# Altium PCB PCB1.PcbDoc
Units mm, origin at the board's own origin, x right, y up, seen from the top; angles counter-clockwise.
Board outline 92 x 63 mm, 2 copper layers (Top Layer, Bottom Layer); 8 components, 13 nets, 59 pads, 26 vias.
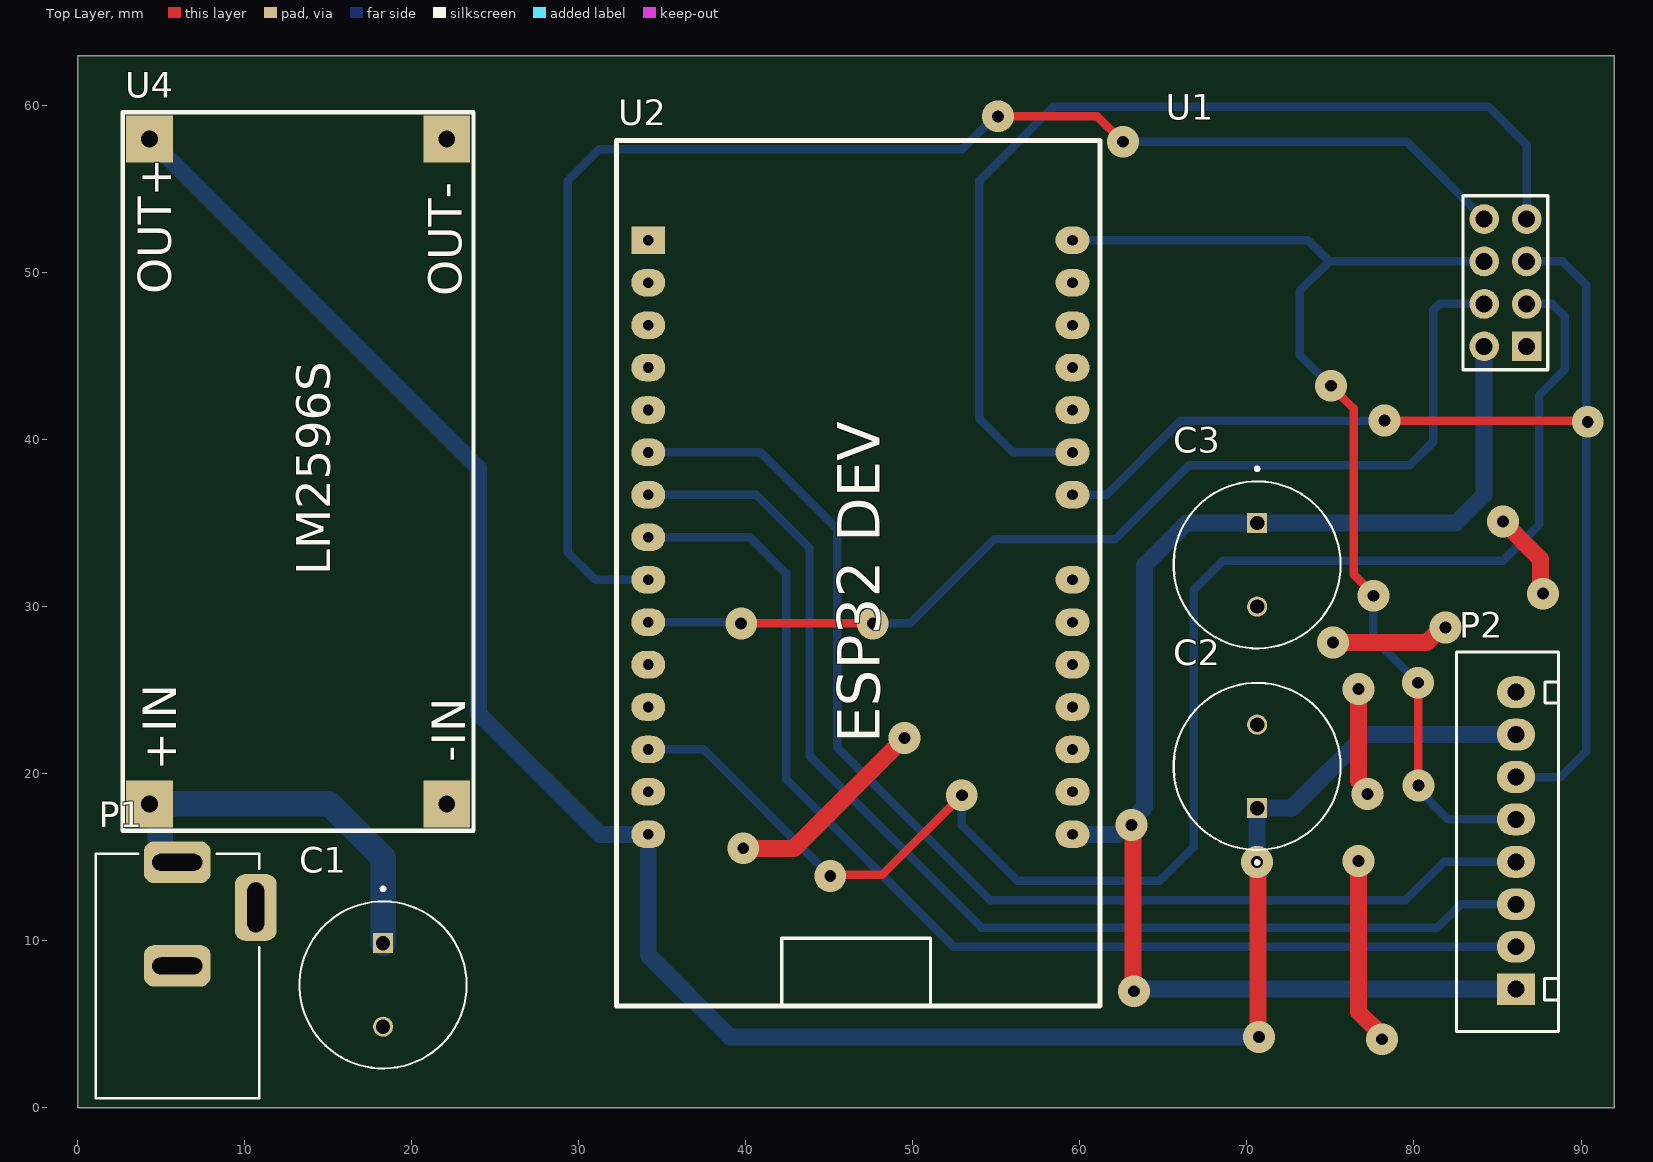
[diagram p0: Top Layer view]
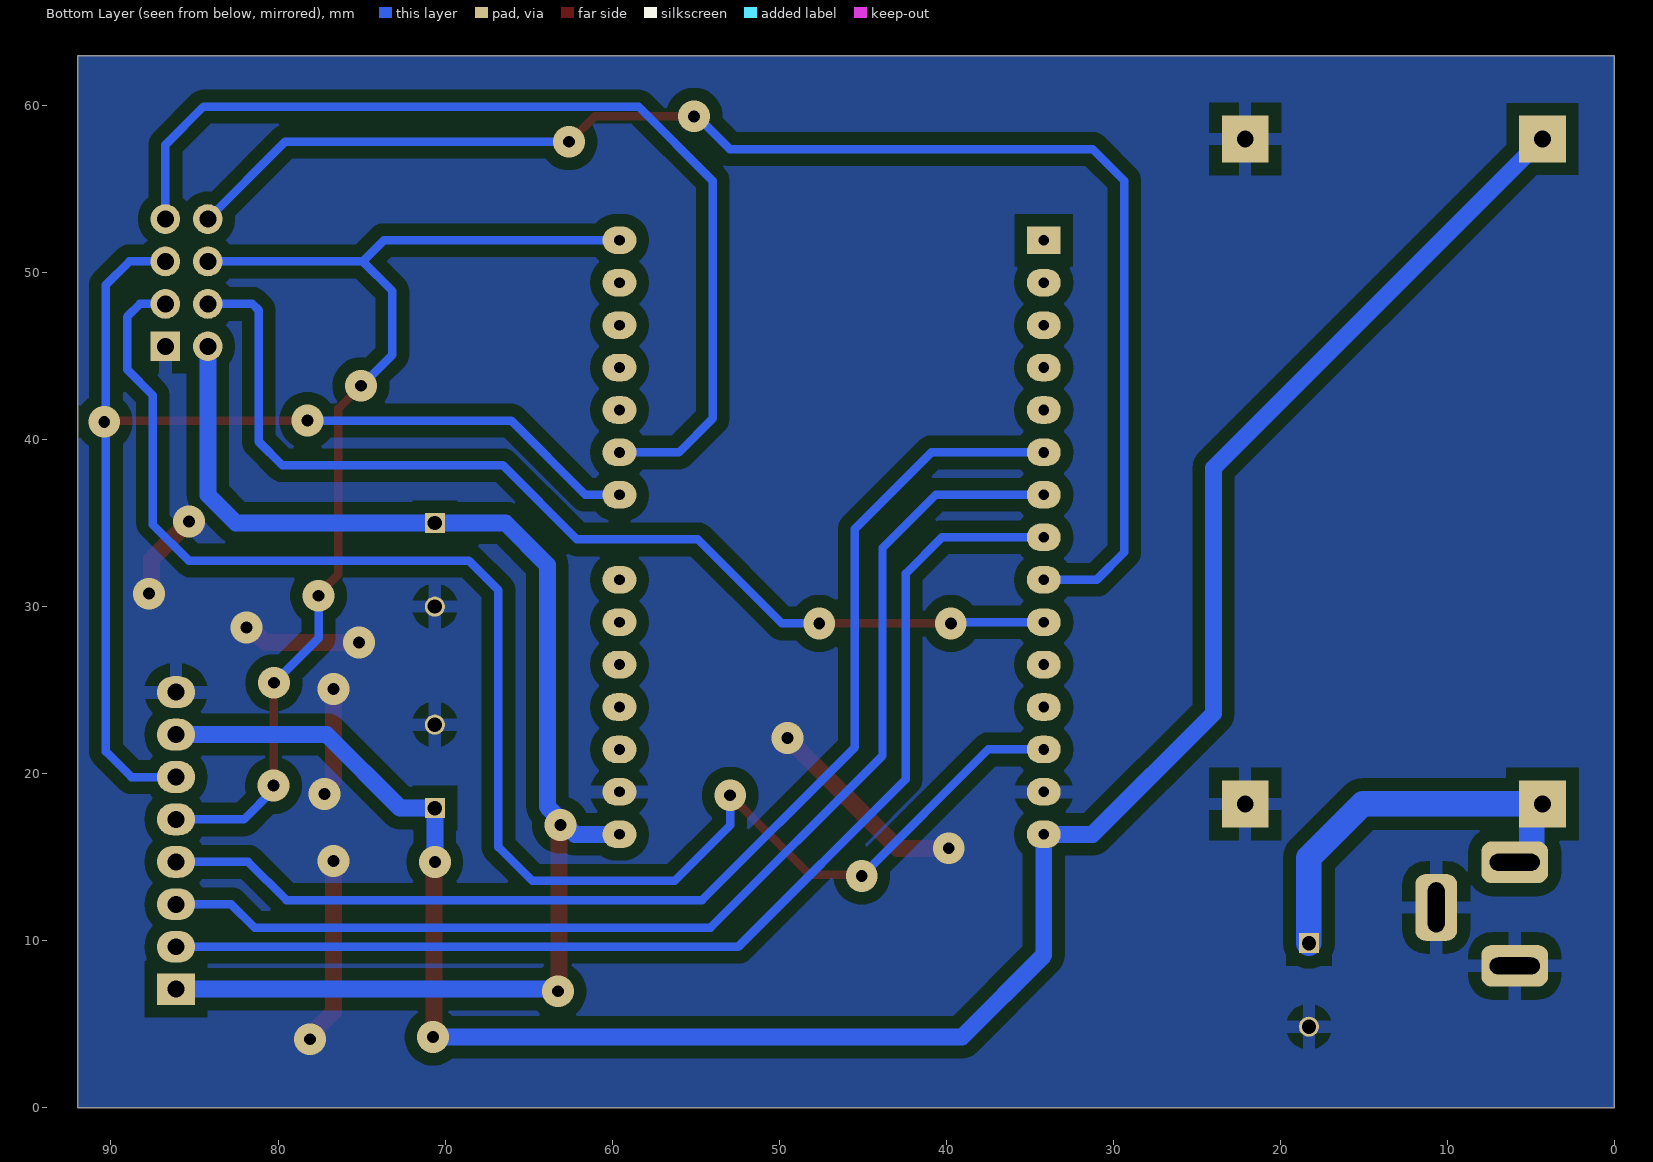
[diagram p1: Bottom Layer view, seen from below]

## Layer stack, top to bottom
Top Solder: solder mask 0.0102, Solder Resist, Dk 3.5
Top Layer: signal copper 0.0356
Dielectric 1: dielectric 0.32, FR-4, Dk 4.8
Bottom Layer: signal copper 0.0356
Bottom Solder: solder mask 0.0102, Solder Resist, Dk 3.5

## Board outline
0,0 0,63 92,63 92,0

## Design rules (kind name [scope] priority, off if disabled: settings)
Clearance [All] p1: gap=0.254 ignorepadtopadclearanceinfootprint=FALSE except(0: Arc-Hole Track-Hole SMDPad-Hole THPad-Hole Via-Hole Fill-Hole Poly-Hole Region-Hole Text-Hole; 0.762: Arc-Fill Arc-Poly Arc-Region Track-Fill Track-Poly Track-Region SMDPad-Fill SMDPad-Poly SMDPad-Region THPad-Fill THPad-Poly THPad-Region Via-Fill Via-Poly Via-Region Fill-Fill Fill-Poly Fill-Region Poly-Poly Poly-Region Region-Region)
PlaneClearance [All] p1: clearance=0.762
PlaneConnect [All] p1: planeconnectstyle=Relief reliefexpansion=0.762 reliefentries=4 reliefconductorwidth=0.762 reliefairgap=0.762
PolygonConnect [All] p1: connectstyle=Relief reliefconductorwidth=0.762 reliefentries=4 polygonreliefangle="90 Angle" airgapwidth=0.762
RoutingVias [All] p1: holewidth=0.711 width=1.27 viastyle="Through Hole" minholewidth=0.711 minwidth=1.27 maxholewidth=0.711 maxwidth=1.27
SolderMaskExpansion [All] p1: expansion=0.102 istentingtop=FALSE
Width [All] p1: maxlimit=1.524 minlimit=0.508 preferedwidth=1.016 minimp=50.000000 maximp=50.000000 favimp=50.000000
28 further rules are at their usual default settings.

## Components (designator, comment, footprint, x,y, rotation, side; value= is the part's Value field where it differs from the comment)
C1 "220uF/25V" CAP-ALUM-10x12.5 18.288,7.366 r270 top
C2 "220uF/25V" CAP-ALUM-10x12.5 70.612,20.447 r90 top
C3 "220uF/25V" CAP-ALUM-10x12.5 70.612,32.512 r270 top
P1 "JACK DC" DC5.5/2.1 1.469,1.009 r0 top
P2 "LCD TFT" B8B-XH-A 86.106,7.112 r90 top value=B8B-XH-A
U1 "Lora_SX1278" Module-LORA-SX1278 86.741,45.593 r90 top
U2 "ESP32_30P" Kit-ESP32-30P 47.625,28.829 r0 top
U4 "LM2596S" Module-LM2596S 13.208,38.1 r90 top

## Footprints (in the part's own frame and the unit in brackets; to place one, negate y for a bottom-side part, rotate by r counter-clockwise, add the part's x,y. Pads: shape width x height; smd on the part's side, far side on the other; paste and mask are expansions set on the pad)
B8B-XH-A [mil] "B8B-XH-A"
  rect 75x90 hole 40: 1(0,0)
  oval 75x90 hole 40: 2(100,0) 3(200,0) 4(300,0) 5(400,0) 6(500,0) 7(600,0) 8(700,0)
  silkscreen extent -100,-100 795,140, body extent -91,-93 791,133, height 276
CAP-ALUM-10x12.5 [mm] "Capacitor Aluminum 10mmx12.5mm"
  rect 1.2x1.2 hole 0.85: 1(-2.5,0)
  round 1.2 hole 0.85: 2(2.5,0)
  silkscreen extent -5.85,-5 5,5, body extent -5,-5 5,5, height 12.5
DC5.5/2.1 [mm] "DC JACK 5.5/2.1mm"
  rrect50% 4x2.5 hole 1 slot 3 at 0 deg paste-2539.97: 1(4.5,13.7) 3(4.5,7.5)
  rrect50% 2.5x4 hole 1 slot 3 at 90 deg paste-2539.97: 2(9.2,11)
  silkscreen extent -0.38,-0.43 9.4,14.22, body extent -0.18,-0.25 9.22,14.05, height 11.85
Kit-ESP32-30P [mil] "Kit ESP32 30P"
  rect 80x65 hole 25.2: 1(-530,910)
  oval 80x65 hole 25.2: 2(-530,810) 3(-530,710) 4(-530,610) 5(-530,510) 6(-530,410) 7(-530,310) 8(-530,210) 9(-530,110) 10(-530,10) 11(-530,-90) 12(-530,-190) 13(-530,-290) 14(-530,-390) 15(-530,-490) 16(470,-490) 17(470,-390) 18(470,-290) 19(470,-190) 20(470,-90) 21(470,10) 22(470,110) 24(470,310) 25(470,410) 26(470,510) 27(470,610) 28(470,710) 29(470,810) 30(470,910)
  round 0 all layers, no hole: 23(470,-1135)
  silkscreen extent -605,-895 535,1145, body extent -596,-880 526,1125, height 473
Module-LM2596S [mm] "Module LM2596S"
  rect 2.799x2.799 hole 1 paste-2539.97 mask+0.102: 1(-19.9,8.9) 2(-19.9,-8.9) 3(19.9,8.9) 4(19.9,-8.9)
  silkscreen extent -21.5,-10.5 21.5,10.5, body extent -21.6,-10.63 21.6,10.63, height 13.35
Module-LORA-SX1278 [mil] "Module Lora SX1278 RA-02 SPI"
  rect 70x70 hole 40.16: 1(0,0)
  round 70 hole 40.16: 2(100,0) 3(200,0) 4(300,0) 5(0,100) 6(100,100) 7(200,100) 8(300,100)
  silkscreen extent -55,-50 355,150, body extent -204,-50 504,861, height 497

## Part data
C1 C2 C3: library part EEUTA1E221, "Capacitor Aluminum 220uF 20% 25V Radial", MPN=CLA4514, Category=CAPACITOR, MFR_URL=http://linhkienchatluong.vn/tu-hoa-chat-luong-cao/tu-hoa-63v-47uf-nipponlelon-8x11mm_sp977_ct6500.aspx, PinCount=2, Solder=WAVE
P1: library part DC5.5/2.1, "Low Voltage Power Supply Connector"
P2: library part B8B-XH-A, "Connector Header Through Hole 8 position 0.098\" (2.50mm)"
U1: library part Module-Lora-SX1278-SPI, "Module Lora SX1278 RA02 SPI"
U2: library part Kit_ESP32_30P, "Kit ESP32 30P"
U4: library part Module-LM2596S, "Module LM2596S"

## Via types
v1: diameter 1.905, hole 0.711, Top Layer to Bottom Layer, 26 vias

## Nets (pads, with @x,y where several pads share a name; then routed paths per layer and width w, separated by ;. In a path a pad name is that pad's centre, name@x,y a point inside that pad or via, vN(x,y) a via of type N, cw(c..) or ccw(c..) an arc to the next point about the centre after c; other vN are vias at no path point)
DC3V3: C3.1 P2.1 U1.5 U2.16 | length 83.4
  Top Layer w1.016: v1(63.094,16.944) 63.17,16.867 63.17,7.061 v1(63.246,6.985)
  Bottom Layer w1.016: U2.16 62.23,16.383 63.881,18.034 63.881,32.512 66.381,35.012 C3.1 82.51,35.012 84.201,36.703 U1.5 ; v1(63.246,6.985) 63.373,7.112 P2.1
DC5V: C2.1 P2.7 U2.15 U4.3 | length 132.2
  Top Layer w1.016: v1@70.612,4.572 70.663,4.623 70.663,14.681 v1(70.612,14.732)
  Bottom Layer w1.016: U4.3 24.003,38.305 24.003,23.622 31.242,16.383 U2.15 34.163,9.144 39.063,4.244 v1(70.714,4.244) ; v1(70.612,14.732) C2.1 72.684,17.947 77.089,22.352 P2.7
GND: C1.2 C2.2 C3.2 P1.2 P1.3 P2.8 U1.1 U2.14 U2.17 U4.2 U4.4 | length 42.5
  Top Layer w1.016: v1(39.853,15.547) 42.901,15.547 v1(49.505,22.151) ; v1(75.159,27.866) 80.76,27.866 81.649,28.755 v1(81.89,28.755) ; v1(76.683,14.785) 76.683,5.754 78.08,4.357 v1(78.08,4.117) ; v1(76.683,25.072) 76.683,19.57 77.216,19.037 v1(77.216,18.796) ; v1(85.319,35.105) 87.562,32.862 87.562,30.957 v1(87.732,30.787)
LORA_DIO0: U1.8 U2.9 | length 86.5
  Top Layer w0.508: v1(55.093,59.362) 61.034,59.362 v1@62.484,57.912
  Bottom Layer w0.508: U2.9 30.988,31.623 29.337,33.274 29.337,55.499 31.242,57.404 52.959,57.404 v1@54.991,59.436 ; v1(62.586,57.838) 79.576,57.838 U1.8
LORA_NSS: U1.6 U2.10 | length 62.2
  Top Layer w0.508: v1(39.726,29.009) v1@47.297,29.009
  Bottom Layer w0.508: U2.10 v1@39.624,29.083 ; v1(47.6,29.009) 49.837,29.009 54.864,34.036 62.103,34.036 66.548,38.481 79.756,38.481 81.153,39.878 81.153,47.752 81.534,48.133 U1.6
LORA_RST: U1.2 U2.13 | length 95.2
  Top Layer w0.508: v1@44.958,13.97 48.182,13.97 v1(52.934,18.722)
  Bottom Layer w0.508: U2.13 37.492,21.463 v1(45.06,13.896) ; v1(52.934,18.722) 52.934,16.916 56.261,13.589 64.77,13.589 66.802,15.621 66.802,30.988 68.58,32.766 85.344,32.766 87.503,34.925 87.503,42.672 89.027,44.196 89.027,47.371 88.265,48.133 U1.2
SPI_MISO: U1.4 U2.25 | length 60.7
  Bottom Layer w0.508: U2.25 56.007,39.243 53.975,41.275 53.975,55.499 58.42,59.944 84.455,59.944 86.741,57.658 U1.4
SPI_MOSI: P2.5 U1.7 U2.30 | length 66.6
  Top Layer w0.508: v1(75.032,43.233) 76.385,41.88 76.385,31.946 v1@77.47,30.861 ; v1(80.264,19.304) v1@80.264,25.4
  Bottom Layer w0.508: U2.30 73.66,51.943 74.93,50.673 ; v1@74.93,43.307 73.152,45.085 73.152,48.895 74.93,50.673 ; v1(77.572,30.66) 77.572,28.12 v1(80.239,25.453) ; v1(80.264,19.304) 80.264,19.05 82.042,17.272 P2.5 ; U1.7 74.93,50.673
SPI_SCK: P2.6 U1.3 U2.24 | length 69.5
  Top Layer w0.508: v1(78.232,41.148) v1@90.297,41.148
  Bottom Layer w0.508: U2.24 61.595,36.703 66.04,41.148 v1(78.232,41.148) ; P2.6 88.773,19.812 90.297,21.336 90.297,49.276 88.9,50.673 U1.3
  other v1: 90.399,41.074
TFT_CS: P2.2 U2.8 | length 69.3
  Bottom Layer w0.508: U2.8 40.259,34.163 42.418,32.004 42.418,19.685 52.451,9.652 P2.2
TFT_RES: P2.4 U2.6 | length 71.7
  Bottom Layer w0.508: U2.6 40.894,39.243 45.466,34.671 45.466,21.59 54.61,12.446 79.502,12.446 81.788,14.732 P2.4
TFT_RS: P2.3 U2.7 | length 70.5
  Bottom Layer w0.508: U2.7 40.64,36.703 43.815,33.528 43.815,21.082 54.102,10.795 81.407,10.795 82.804,12.192 P2.3
VCC: C1.1 P1.1 U4.1 | length 24.9
  Bottom Layer w1.524: P1.1 5.434,14.709 4.946,15.197 4.946,17.562 U4.1 15.074,18.2 18.288,14.986 C1.1
pads on no net: U2.1 U2.2 U2.3 U2.4 U2.5 U2.11 U2.12 U2.18 U2.19 U2.20 U2.21 U2.22 U2.23 U2.26 U2.27 U2.28 U2.29

## Polygon pours and split planes (outlines as drawn)
GND on Bottom Layer "GND_L02_P000" (solid, pour order 0): 0,0 91.948,0 91.948,62.93 91.886,62.992 0,62.992

## Silkscreen, mask and mechanical layers (free items; w line width, h text height)
Mechanical 1:
  the board outline again, w0.5

## Text inside footprints (layer, text, board x,y; h text height)
U2: Top Overlay "ESP32 DEV" at 48.006,21.844 h2.54 r90
U4: Top Overlay "OUT+" at 5.598,48.7 h2 r90; Top Overlay "OUT-" at 23,48.599 h2 r90; Top Overlay "+IN" at 5.898,20.2 h2 r90; Top Overlay "-IN" at 23.198,20.7 h2 r90